# Altium PCB PCB1.PcbDoc
Units mil, origin at the board's own origin, x right, y up, seen from the top; angles counter-clockwise.
Board outline 2645 x 2475 mil, 2 copper layers (Top Layer, Bottom Layer); 55 components, 65 nets, 221 pads, 16 vias.
Unrouted connection lines stored in the file: 45.
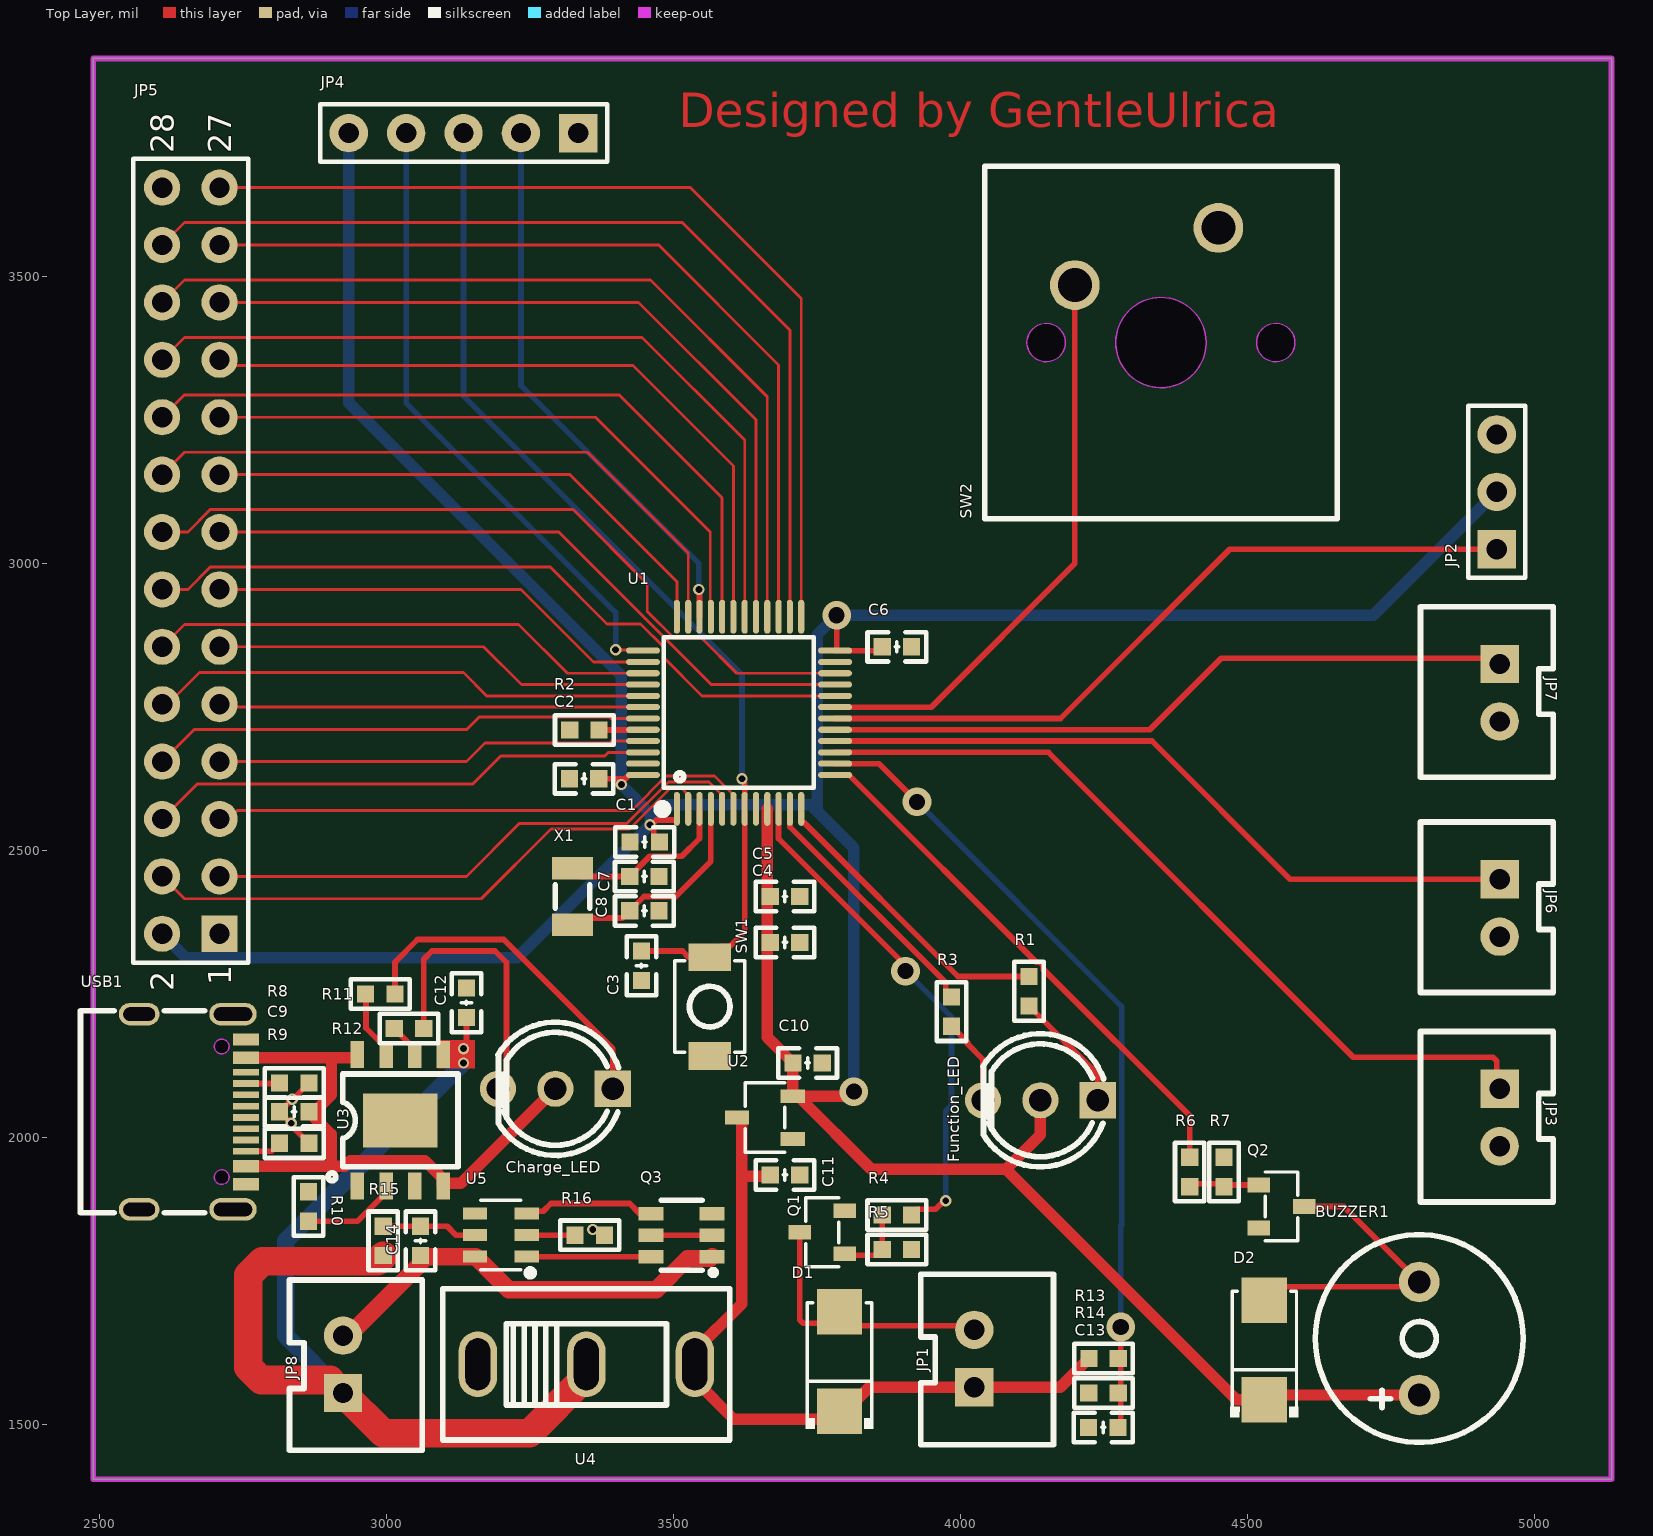
[diagram p0: Top Layer view]
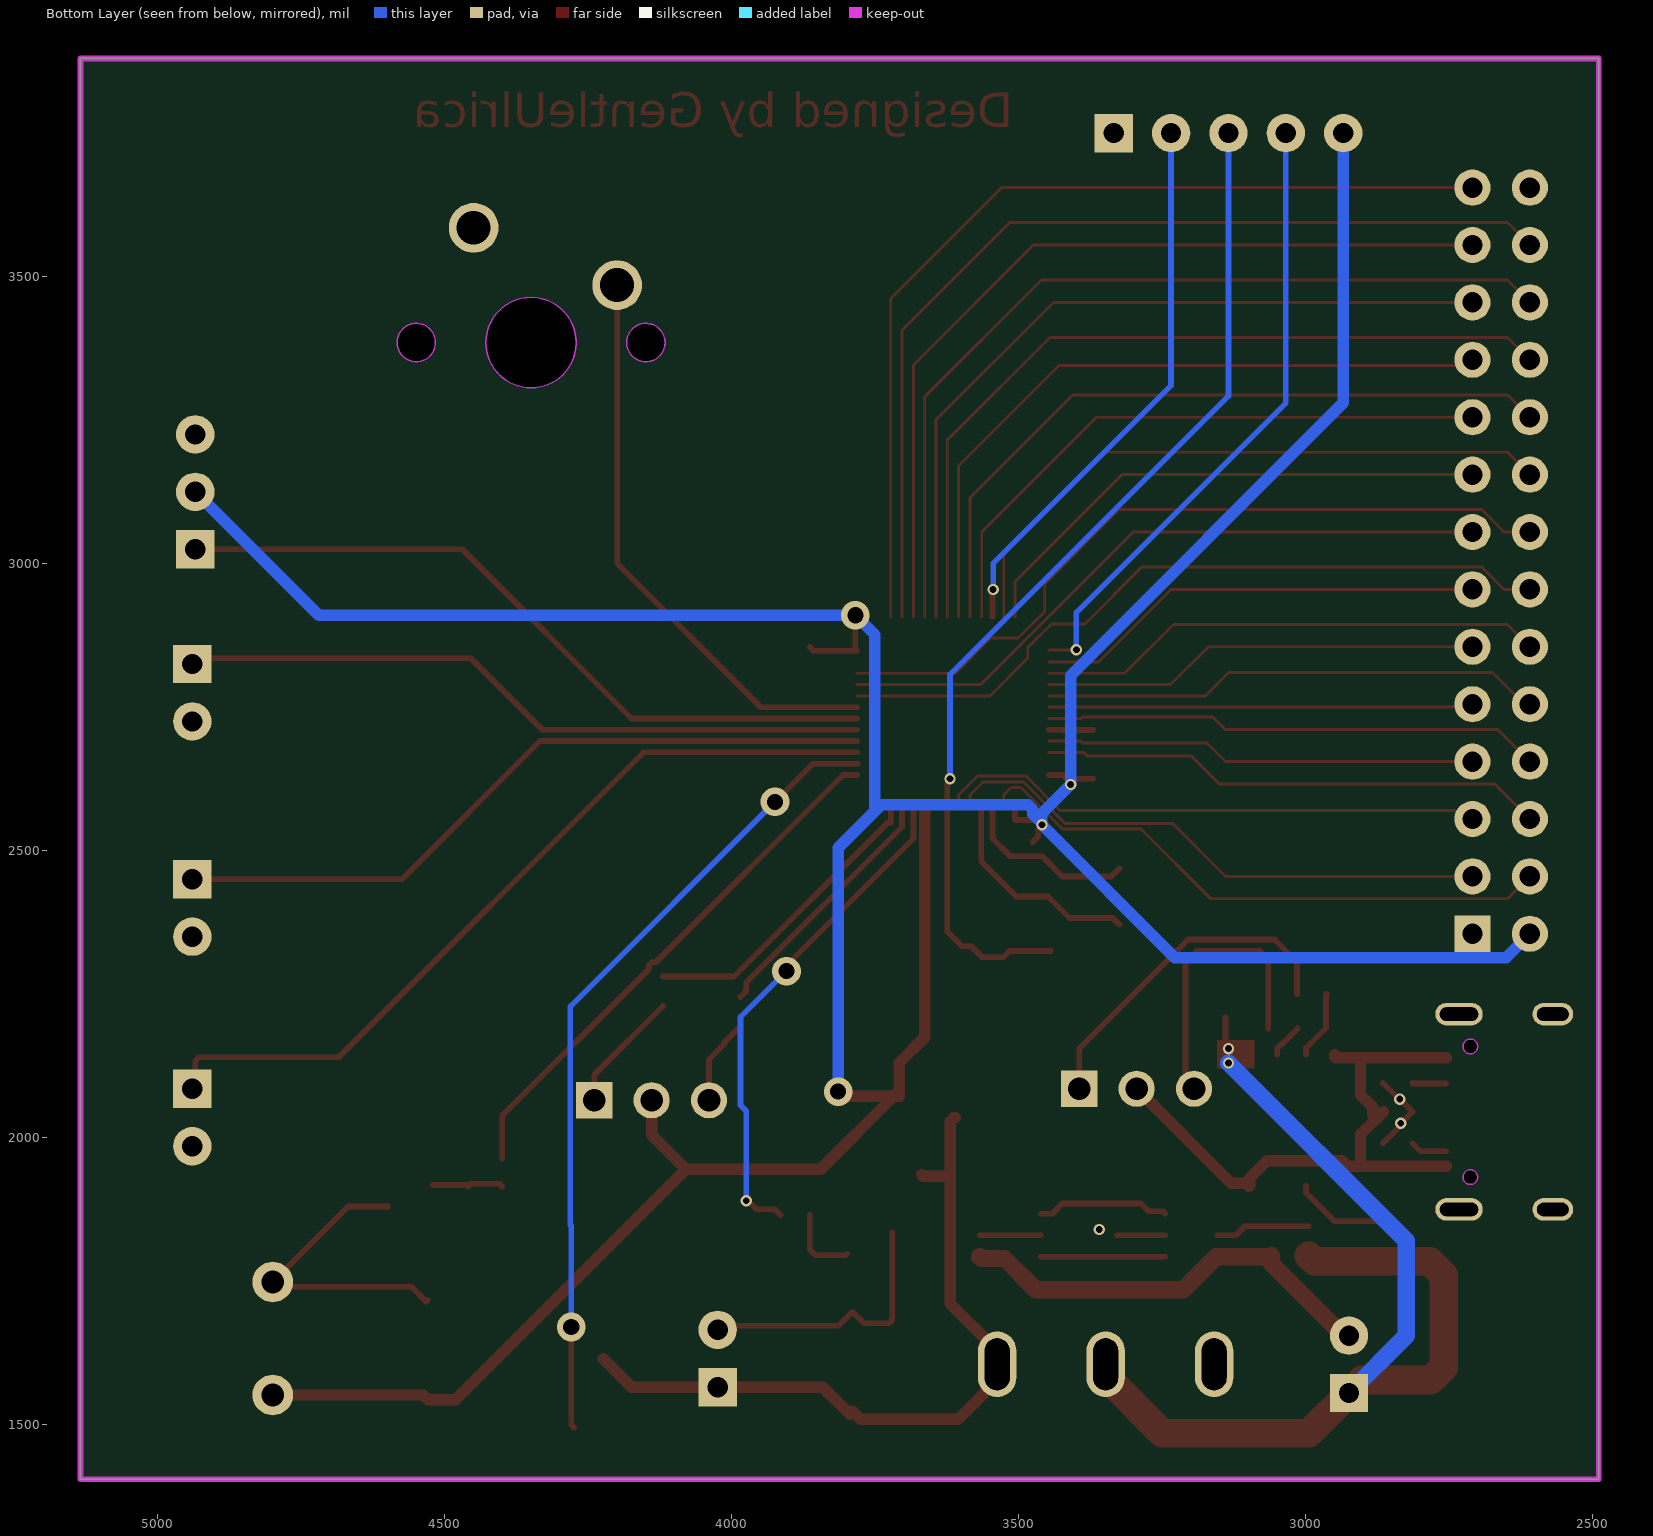
[diagram p1: Bottom Layer view, seen from below]

## Layer stack, top to bottom
Top Solder: solder mask 0.4, Solder Resist, Dk 3.5
Top Layer: signal copper 1.4
Dielectric 1: dielectric 12.6, FR-4, Dk 4.8
Bottom Layer: signal copper 1.4
Bottom Solder: solder mask 0.4, Solder Resist, Dk 3.5

## Board outline
2490,1405 2490,3880 5135,3880 5135,1405

## Design rules (kind name [scope] priority, off if disabled: settings)
Clearance [All] p1: gap=5 ignorepadtopadclearanceinfootprint=FALSE
PolygonConnect [All] p1: connectstyle=Relief reliefconductorwidth=10 reliefentries=4 polygonreliefangle="90 Angle" airgapwidth=10
RoutingVias [All] p1: holewidth=11.81 width=19.68 viastyle="Through Hole" minholewidth=11.81 minwidth=19.68 maxholewidth=11.81 maxwidth=19.68
SolderMaskExpansion [All] p1: expansion=0 istentingtop=FALSE
SupplyNets "Schematic Supply Nets" [InNet('GND')] p1: voltage=0.000
Width [All] p1: maxlimit=10 minlimit=5 preferedwidth=5
30 further rules are at their usual default settings.

## Components (designator, comment, footprint, x,y, rotation, side; value= is the part's Value field where it differs from the comment)
BUZZER1 "hnb09a03" BUZ-TH_BD9.0-P5.00-D0.6-FD 4800,1650 r90 top value=3kHz
C1 "4.7uF" "C 0603_L" 3450.59,2515 r0 top
C2 "100nF" "C 0603_L" 3345,2625 r180 top
C3 "100nF" "C 0603_L" 3445,2299.41 r90 top
C4 "1uF" "C 0603_L" 3695,2340 r180 top
C5 "10nF" "C 0603_L" 3695,2420 r180 top
C6 "100nF" "C 0603_L" 3890,2855 r180 top
C7 "DNP" "C 0603_L" 3450,2455 r180 top
C8 "DNP" "C 0603_L" 3450,2395 r180 top
C9 "10uF" "C 0603_L" 2840,2045 r0 top
C10 "1uF" "C 0603_L" 3734.41,2130 r180 top
C11 "1uF" "C 0603_L" 3695,1935 r180 top
C12 "10uF" "C 0603_L" 3140,2235 r270 top
C13 "100nF" "C 0603_L" 4249.41,1495 r0 top
C14 "100nF" "C 0603_L" 3060,1820 r270 top
Charge_LED "tj-l5fytxhtcylc2r2g-a5" LED-TH_3P-BD5.9-P2.54-BI 3295,2085 r180 top
D1 "ss14_c83852" SMA_L4.3-W2.6-LS5.2-RD 3790,1610 r90 top
D2 "ss14_c83852" SMA_L4.3-W2.6-LS5.2-RD 4530,1630 r90 top
Function_LED "tj-l5fytxhtcylc2r2g-a5" LED-TH_3P-BD5.9-P2.54-BI 4140,2065 r180 top
JP1 "HDR-1X2" XH2.54-LI-2P 4025,1615 r90 top
JP2 "HDR-1X3" HDR2.54-LI-3P 4935,3125 r90 top
JP3 "HDR-1X2" XH2.54-LI-2P 4940,2035 r270 top
JP4 "HDR-1X5" HDR2.54-LI-5P 3135,3750 r180 top
JP5 "Header 2X11" HDR2.54-LI-2x14P 2660,3005 r90 top
JP6 "HDR-1X2" XH2.54-LI-2P 4940,2400 r270 top
JP7 "HDR-1X2" XH2.54-LI-2P 4940,2775 r270 top
JP8 "HDR-1X2" XH2.54-LI-2P 2925,1605 r90 top
Q1 "ao3400a_c347475" SOT-23-3_L2.9-W1.3-P1.90-LS2.4-BR 3760,1835 r0 top
Q2 "ao3400a_c347475" SOT-23-3_L2.9-W1.3-P1.90-LS2.4-BR 4560,1880 r180 top
Q3 "fs8205a" SOT-23-6_L2.9-W1.6-P0.95-LS2.8-BR 3515,1830 r0 top
R1 "1K" "R 0603_L" 4120,2255 r90 top
R2 "10K" "R 0603_L" 3345.59,2710 r180 top
R3 "1K" "R 0603_L" 3985,2219.41 r90 top
R4 "100" "R 0603_L" 3890,1865 r180 top
R5 "10K" "R 0603_L" 3890,1805 r180 top
R6 "100" "R 0603_L" 4400,1940 r90 top
R7 "10K" "R 0603_L" 4460,1940 r270 top
R8 "5.1K" "R 0603_L" 2840,2095 r180 top
R9 "5.1K" "R 0603_L" 2840,1990 r180 top
R10 "2.4K" "R 0603_L" 2865,1880 r270 top
R11 "2.2K" "R 0603_L" 2990,2250 r180 top
R12 "2.2K" "R 0603_L" 3040,2190 r180 top
R13 "1M" "R 0603_L" 4250,1615 r180 top
R14 "1M" "R 0603_L" 4250,1555 r0 top
R15 "100" "R 0603_L" 2995,1820 r90 top
R16 "1K" "R 0603_L" 3355,1830 r180 top
SW1 "ts-1088-ar02016" SW-SMD_L3.9-W3.0-P4.45 3563.94,2228.19 r90 top
SW2 "mx1a-11nw" SW-TH_MX1A-11NW 4325,3535 r0 top
U1 "stm32f031c6t6" LQFP-48_L7.0-W7.0-P0.50-LS9.0-BL 3615,2740 r0 top locked
U2 "xc6206p332mr-g_c5446" SOT-23-3_L2.9-W1.6-P1.90-LS2.8-BR 3660,2035 r0 top
U3 "tp4056_c382139" ESOP-8_L4.9-W3.9-P1.27-LS6.0-BL-EP 3025,2030 r0 top
U4 "hx ss12d10g5" SW-TH_3P-P4.80-HX-SS12D10G4 3348.97,1605 r0 top
U5 "dw01a_c351410" SOT-23-6_L2.9-W1.6-P0.95-LS2.8-BL 3200,1830 r90 top
USB1 "typec-16p_c53207138" USB-C-SMD_TYPEC-16P_C53207138 2663.01,2044.92 r270 top
X1 "q13fc13500004_c32346" FC-135R_L3.2-W1.5 3325,2420 r270 top value=32.768kHz

## Footprints (in the part's own frame and the unit in brackets; to place one, negate y for a bottom-side part, rotate by r counter-clockwise, add the part's x,y. Pads: shape width x height; smd on the part's side, far side on the other; paste and mask are expansions set on the pad)
BUZ-TH_BD9.0-P5.00-D0.6-FD [mm]
  round 1.8 hole 1 copper offset 0,0: 1(-2.5,0)
  round 1.8 hole 1: 2(2.5,0)
  silkscreen extent -4.6,-4.6 4.6,4.6
"C 0603_L" [mil] "无极性贴片电容                                       淘宝ID:黄晶宝石"
  rect 30x30 smd: 1(-25.59,0) 2(25.59,0)
  silkscreen extent -51,-26 51,26, body extent -31,-16 31,16, height 32
ESOP-8_L4.9-W3.9-P1.27-LS6.0-BL-EP [mm]
  rect 0.6x1.2 smd: 1(-1.905,-2.908) 2(-0.635,-2.908) 3(0.635,-2.908) 4(1.905,-2.908) 5(1.905,2.908) 6(0.635,2.908) 7(-0.635,2.908) 8(-1.905,2.908)
  rect 3.3x2.4 smd: 9(0,0)
  silkscreen extent -3.2,-2.67 2.55,2.05
FC-135R_L3.2-W1.5 [mm]
  rect 1x1.8 smd: 1(-1.25,0) 2(1.25,0)
  silkscreen extent -0.51,-0.76 0.51,0.76
HDR2.54-LI-2x14P [mm] "双排排针，14x2脚 淘宝ID:黄晶宝石   店铺网址:https://shop463601444.taobao.com"
  rect 1.6x1.6 hole 0.9: 1(-16.51,-1.27)
  round 1.6 hole 0.9: 2(-16.51,1.27) 3(-13.97,-1.27) 4(-13.97,1.27) 5(-11.43,-1.27) 6(-11.43,1.27) 7(-8.89,-1.27) 8(-8.89,1.27) 9(-6.35,-1.27) 10(-6.35,1.27) 11(-3.81,-1.27) 12(-3.81,1.27) 13(-1.27,-1.27) 14(-1.27,1.27) 15(1.27,-1.27) 16(1.27,1.27) 17(3.81,-1.27) 18(3.81,1.27) 19(6.35,-1.27) 20(6.35,1.27) 21(8.89,-1.27) 22(8.89,1.27) 23(11.43,-1.27) 24(11.43,1.27) 25(13.97,-1.27) 26(13.97,1.27) 27(16.51,-1.27) 28(16.51,1.27)
  silkscreen extent -17.78,-2.54 17.78,2.54, body extent -17.78,-2.54 17.78,2.54, height 8.5
HDR2.54-LI-3P [mm] "排针，3脚"
  rect 1.7x1.7 hole 0.9: 1(-2.54,0)
  round 1.7 hole 0.9: 2(0,0) 3(2.54,0)
  silkscreen extent -3.81,-1.27 3.81,1.27, body extent -3.81,-1.27 3.81,1.27, height 8.5
HDR2.54-LI-5P [mm] "排针，5脚"
  rect 1.7x1.7 hole 0.9: 1(-5.08,0)
  round 1.7 hole 0.9: 2(-2.54,0) 3(0,0) 4(2.54,0) 5(5.08,0)
  silkscreen extent -6.35,-1.27 6.35,1.27, body extent -6.35,-1.27 6.35,1.27, height 8.5
LED-TH_3P-BD5.9-P2.54-BI [mm]
  rect 1.6x1.6 hole 1: 1(-2.54,0)
  round 1.6 hole 1: 2(0,0) 3(2.54,0)
  silkscreen extent -2.79,-2.95 2.54,2.95
LQFP-48_L7.0-W7.0-P0.50-LS9.0-BL [mm]
  oval 0.27x1.5 smd paste+0 mask+0.05: 1(-2.75,-4.25) 2(-2.25,-4.25) 3(-1.75,-4.25) 4(-1.25,-4.25) 5(-0.75,-4.25) 6(-0.25,-4.25) 7(0.25,-4.25) 8(0.75,-4.25) 9(1.25,-4.25) 10(1.75,-4.25) 11(2.25,-4.25) 12(2.75,-4.25) 25(2.75,4.25) 26(2.25,4.25) 27(1.75,4.25) 28(1.25,4.25) 29(0.75,4.25) 30(0.25,4.25) 31(-0.25,4.25) 32(-0.75,4.25) 33(-1.25,4.25) 34(-1.75,4.25) 35(-2.25,4.25) 36(-2.75,4.25)
  oval 1.5x0.27 smd paste+0 mask+0.05: 13(4.25,-2.75) 14(4.25,-2.25) 15(4.25,-1.75) 16(4.25,-1.25) 17(4.25,-0.75) 18(4.25,-0.25) 19(4.25,0.25) 20(4.25,0.75) 21(4.25,1.25) 22(4.25,1.75) 23(4.25,2.25) 24(4.25,2.75) 37(-4.25,2.75) 38(-4.25,2.25) 39(-4.25,1.75) 40(-4.25,1.25) 41(-4.25,0.75) 42(-4.25,0.25) 43(-4.25,-0.25) 44(-4.25,-0.75) 45(-4.25,-1.25) 46(-4.25,-1.75) 47(-4.25,-2.25) 48(-4.25,-2.75)
  silkscreen extent -3.59,-4.46 3.3,3.34
"R 0603_L" [mil] "1/10W贴片电阻                 淘宝ID:黄晶宝石"
  rect 30x30 smd: 1(-25.59,0) 2(25.59,0)
  silkscreen extent -51,-26 51,26, body extent -31,-16 32,16, height 16
SMA_L4.3-W2.6-LS5.2-RD [mm]
  rect 2x2 smd: 1(-2.2,0) 2(2.2,0)
  silkscreen extent -2.98,-1.5 2.6,1.5
SOT-23-3_L2.9-W1.3-P1.90-LS2.4-BR [mm]
  rect 1x0.65 smd: 1(1,-0.95) 2(1,0.95) 3(-1,0)
  silkscreen extent -0.73,-1.53 0.73,1.53
SOT-23-3_L2.9-W1.6-P1.90-LS2.8-BR [mm]
  rect 1.07x0.6 smd: 1(1.235,-0.95) 2(1.235,0.95) 3(-1.235,0)
  silkscreen extent -0.88,-1.54 0.88,1.54
SOT-23-6_L2.9-W1.6-P0.95-LS2.8-BL [mil]
  rect 20.95x42.2 smd: 1(-37.4,-45.24) 2(0,-45.24) 3(37.4,-45.24) 4(37.4,45.24) 5(0,45.24) 6(-37.4,45.24)
  silkscreen extent -72,-57 61,35
SOT-23-6_L2.9-W1.6-P0.95-LS2.8-BR [mm]
  rect 1.1x0.6 smd paste+0 mask+0.051: 1(1.35,-0.95) 2(1.35,0) 3(1.35,0.95) 4(-1.35,0.95) 5(-1.35,0) 6(-1.35,-0.95)
  silkscreen extent -0.9,-1.78 1.52,1.55
SW-SMD_L3.9-W3.0-P4.45 [mm]
  rect 1.23x1.86 smd: 1(-2.185,0) 2(2.185,0)
  silkscreen extent -2.03,-1.54 2.03,1.54
SW-TH_3P-P4.80-HX-SS12D10G4 [mm]
  oval 1.7x2.9 hole 1.1 slot 2.3 at 90 deg paste-2539.97 mask+0.05: 1(-4.8,0) 2(0,0) 3(4.8,0)
  silkscreen extent -6.35,-3.35 6.35,3.35
SW-TH_MX1A-11NW [mm]
  round 2.2 hole 1.5 paste-2539.97 mask+0.05: 1(-3.175,-1.27) 2(3.175,1.27)
  Keep-Out Layer board cut-out: 2.635,-3.81 2.436,-4.677 1.881,-5.373 1.08,-5.759 0.19,-5.759 -0.611,-5.373 -1.166,-4.677 -1.364,-3.81 -1.365,-3.81 -1.166,-2.943 -0.611,-2.247 0.19,-1.861 1.08,-1.861 1.881,-2.247 2.436,-2.943 2.634,-3.81
  Keep-Out Layer board cut-out: -3.594,-3.81 -3.678,-4.179 -3.914,-4.475 -4.256,-4.64 -4.634,-4.64 -4.976,-4.475 -5.212,-4.179 -5.296,-3.81 -5.296,-3.81 -5.212,-3.441 -4.976,-3.145 -4.634,-2.98 -4.256,-2.98 -3.914,-3.145 -3.678,-3.441 -3.594,-3.81
  Keep-Out Layer board cut-out: 6.566,-3.81 6.482,-4.179 6.246,-4.475 5.904,-4.64 5.526,-4.64 5.184,-4.475 4.948,-4.179 4.864,-3.81 4.864,-3.81 4.948,-3.441 5.184,-3.145 5.526,-2.98 5.904,-2.98 6.246,-3.145 6.482,-3.441 6.566,-3.81
  Keep-Out Layer circle w0.003: c0.635,-3.81 r2
  Keep-Out Layer circle w0.003: c-4.445,-3.81 r0.851
  Keep-Out Layer circle w0.003: c5.715,-3.81 r0.851
  Keep-Out Layer region: 2.635,-3.81 2.436,-4.677 1.881,-5.373 1.08,-5.759 0.19,-5.759 -0.611,-5.373 -1.166,-4.677 -1.364,-3.81 -1.365,-3.81 -1.166,-2.943 -0.611,-2.247 0.19,-1.861 1.08,-1.861 1.881,-2.247 2.436,-2.943 2.634,-3.81
  Keep-Out Layer region: -3.594,-3.81 -3.678,-4.179 -3.914,-4.475 -4.256,-4.64 -4.634,-4.64 -4.976,-4.475 -5.212,-4.179 -5.296,-3.81 -5.296,-3.81 -5.212,-3.441 -4.976,-3.145 -4.634,-2.98 -4.256,-2.98 -3.914,-3.145 -3.678,-3.441 -3.594,-3.81
  Keep-Out Layer region: 6.566,-3.81 6.482,-4.179 6.246,-4.475 5.904,-4.64 5.526,-4.64 5.184,-4.475 4.948,-4.179 4.864,-3.81 4.864,-3.81 4.948,-3.441 5.184,-3.145 5.526,-2.98 5.904,-2.98 6.246,-3.145 6.482,-3.441 6.566,-3.81
  Keep-Out Layer region: 2.635,-3.81 2.625,-4.006 2.597,-4.2 2.549,-4.391 2.483,-4.575 2.399,-4.753 2.298,-4.921 2.181,-5.079 2.049,-5.224 1.904,-5.356 1.746,-5.473 1.578,-5.574 1.4,-5.658 1.216,-5.724 1.025,-5.772 0.831,-5.8 0.635,-5.81 0.439,-5.8 0.245,-5.772 0.054,-5.724 -0.13,-5.658 -0.308,-5.574 -0.476,-5.473 -0.634,-5.356 -0.779,-5.224 -0.911,-5.079 -1.028,-4.921 -1.129,-4.753 -1.213,-4.575 -1.279,-4.391 -1.327,-4.2 -1.355,-4.006 -1.365,-3.81 -1.355,-3.614 -1.327,-3.42 -1.279,-3.229 -1.213,-3.045 -1.129,-2.867 -1.028,-2.699 -0.911,-2.541 -0.779,-2.396 -0.634,-2.264 -0.476,-2.147 -0.308,-2.046 -0.13,-1.962 0.054,-1.896 0.245,-1.848 0.439,-1.82 0.635,-1.81 0.831,-1.82 1.025,-1.848 1.216,-1.896 1.4,-1.962 1.578,-2.046 1.746,-2.147 1.904,-2.264 2.049,-2.396 2.181,-2.541 2.298,-2.699 2.399,-2.867 2.483,-3.045 2.549,-3.229 2.597,-3.42 2.625,-3.614 2.635,-3.81
  Keep-Out Layer region: -3.594,-3.81 -3.604,-3.937 -3.632,-4.061 -3.678,-4.179 -3.742,-4.289 -3.821,-4.389 -3.914,-4.475 -4.02,-4.547 -4.134,-4.602 -4.256,-4.64 -4.381,-4.659 -4.509,-4.659 -4.634,-4.64 -4.756,-4.602 -4.87,-4.547 -4.976,-4.475 -5.069,-4.389 -5.148,-4.289 -5.212,-4.179 -5.258,-4.061 -5.286,-3.937 -5.296,-3.81 -5.286,-3.683 -5.258,-3.559 -5.212,-3.441 -5.148,-3.331 -5.069,-3.231 -4.976,-3.145 -4.87,-3.073 -4.756,-3.018 -4.634,-2.98 -4.509,-2.961 -4.381,-2.961 -4.256,-2.98 -4.134,-3.018 -4.02,-3.073 -3.914,-3.145 -3.821,-3.231 -3.742,-3.331 -3.678,-3.441 -3.632,-3.559 -3.604,-3.683 -3.594,-3.81
  Keep-Out Layer region: 6.566,-3.81 6.556,-3.937 6.528,-4.061 6.482,-4.179 6.418,-4.289 6.339,-4.389 6.246,-4.475 6.14,-4.547 6.026,-4.602 5.904,-4.64 5.779,-4.659 5.651,-4.659 5.526,-4.64 5.404,-4.602 5.29,-4.547 5.184,-4.475 5.091,-4.389 5.012,-4.289 4.948,-4.179 4.902,-4.061 4.874,-3.937 4.864,-3.81 4.874,-3.683 4.902,-3.559 4.948,-3.441 5.012,-3.331 5.091,-3.231 5.184,-3.145 5.29,-3.073 5.404,-3.018 5.526,-2.98 5.651,-2.961 5.779,-2.961 5.904,-2.98 6.026,-3.018 6.14,-3.073 6.246,-3.145 6.339,-3.231 6.418,-3.331 6.482,-3.441 6.528,-3.559 6.556,-3.683 6.566,-3.81
  silkscreen extent -7.17,-11.61 8.43,3.99
USB-C-SMD_TYPEC-16P_C53207138 [mm]
  oval 1x2.1 hole 0.6 slot 1.7 at 90 deg paste-2539.97 mask+0.05: 12(-4.32,1.787) 13(4.32,1.787)
  oval 1x1.8 hole 0.6 slot 1.4 at 90 deg paste-2539.97 mask+0.05: 14(-4.32,-2.362) 15(4.32,-2.362)
  rect 0.3x1.15 smd paste-100 mask+0.05: A5(-1.25,2.362) A6(-0.25,2.362) A7(0.25,2.362) A8(1.25,2.362) B5(1.75,2.362) B6(0.75,2.362) B7(-0.75,2.362) B8(-1.75,2.362)
  rect 0.55x1.15 smd paste-100 mask+0.05: A9B4(2.4,2.362) A12B1(3.2,2.362) B9A4(-2.4,2.362) B12A1(-3.2,2.362)
  Keep-Out Layer board cut-out: -2.565,1.287 -2.597,1.146 -2.687,1.033 -2.818,0.97 -2.962,0.97 -3.093,1.033 -3.183,1.146 -3.215,1.287 -3.215,1.287 -3.183,1.428 -3.093,1.542 -2.962,1.604 -2.818,1.604 -2.687,1.542 -2.597,1.428 -2.565,1.287
  Keep-Out Layer board cut-out: 3.215,1.287 3.183,1.146 3.093,1.033 2.962,0.97 2.818,0.97 2.687,1.033 2.597,1.146 2.565,1.287 2.565,1.287 2.597,1.428 2.687,1.542 2.818,1.604 2.962,1.604 3.093,1.542 3.183,1.428 3.215,1.287
  Keep-Out Layer circle w0.003: c-2.89,1.287 r0.325
  Keep-Out Layer circle w0.003: c2.89,1.287 r0.325
  Keep-Out Layer region: -2.565,1.287 -2.597,1.146 -2.687,1.033 -2.818,0.97 -2.962,0.97 -3.093,1.033 -3.183,1.146 -3.215,1.287 -3.215,1.287 -3.183,1.428 -3.093,1.542 -2.962,1.604 -2.818,1.604 -2.687,1.542 -2.597,1.428 -2.565,1.287
  Keep-Out Layer region: 3.215,1.287 3.183,1.146 3.093,1.033 2.962,0.97 2.818,0.97 2.687,1.033 2.597,1.146 2.565,1.287 2.565,1.287 2.597,1.428 2.687,1.542 2.818,1.604 2.962,1.604 3.093,1.542 3.183,1.428 3.215,1.287
  Keep-Out Layer region: -2.565,1.287 -2.574,1.21 -2.602,1.136 -2.647,1.072 -2.705,1.02 -2.775,0.984 -2.851,0.965 -2.929,0.965 -3.005,0.984 -3.075,1.02 -3.133,1.072 -3.178,1.136 -3.206,1.21 -3.215,1.287 -3.206,1.365 -3.178,1.438 -3.133,1.503 -3.075,1.555 -3.005,1.591 -2.929,1.61 -2.851,1.61 -2.775,1.591 -2.705,1.555 -2.647,1.503 -2.602,1.438 -2.574,1.365 -2.565,1.287
  Keep-Out Layer region: 3.215,1.287 3.206,1.21 3.178,1.136 3.133,1.072 3.075,1.02 3.005,0.984 2.929,0.965 2.851,0.965 2.775,0.984 2.705,1.02 2.647,1.072 2.602,1.136 2.574,1.21 2.565,1.287 2.574,1.365 2.602,1.438 2.647,1.503 2.705,1.555 2.775,1.591 2.851,1.61 2.929,1.61 3.005,1.591 3.075,1.555 3.133,1.503 3.178,1.438 3.206,1.365 3.215,1.287
  silkscreen extent -4.47,-4.96 4.47,0.52
XH2.54-LI-2P [mm] "接插件，2P  淘宝ID:黄晶宝石   店铺网址:https://shop463601444.taobao.com"
  rect 1.7x1.7 hole 0.9: 1(-1.27,0)
  round 1.7 hole 0.9: 2(1.27,0)
  silkscreen extent -3.81,-3.51 3.74,2.37, body extent -3.77,-3.3 3.77,2.4, height 7.05

## Part data
BUZZER1: "驱动方式:有源(内含驱动线路);构造类型:电磁式;额定电压:3V;频率:3kHz;声压(SPL):85dB;", Continuous Operating Time=-, Current Consumption=30mA, JLCPCB Part Class="Extended Part", LCSC Part Name=电磁式有源一体蜂鸣器HNB09A03, Manufacturer=华能, ManufacturerPart=HNB09A03, Operating Temperature=-20℃~+70℃, Voltage - Supply=1.5V~4.5V, Voltage Rating=3V, AddInBom=yes, ConvertToPcb=yes, Datasheet=https://item.szlcsc.com/datasheet/HNB09A03/97306.html, Diameter(φD)=9mm, Driver Circuitry=有源(内含驱动线路), FootprintName=BUZ-TH_BD9.0-P5.00-D0.6-FD, Height=5.5mm, Lead Pitch=-, Length=-, ModelId=13273335caac486e928bafb4d9fdf12d, ModelName=BUZ-TH_D9.0-H5.5-P5.0, ModelTransform=354.33,354.33,0,90,0,0,-0.005,0,-177.165, Mounting Type=-, Sound Pressure Level(SPL)=85dB, Supplier=LCSC, Supplier Footprint=插件,D=9mm, SupplierPart=C96102, Symbol=HNB09A03, Technology=电磁式, Width=-
C1 C2 C3 C4 C5 C6 C7 C8 C9 C10 C11 C12 C13 C14: library part C, "贴片电容", BOM名称=无极性贴片电容, 淘宝ID="封装库来自淘宝 ID：黄晶宝石", 联系售后=https://shop463601444.taobao.com
Charge_LED Function_LED: "灯头类型:5mm圆形灯头;发光颜色:红色,翠绿色;正向压降(Vf):1.8V~2.6V；2.8V~3.6V;功率:180mW;正向电流:20mA;波长:515nm~530nm；620nm~630nm;二极管配置:共阳极;透镜颜色:无色透明透镜;色温:-;发光强度:3cd；12cd;发光角度:-;载带方式:-;工作温度:-20℃~+80℃;", Color Temperature=-, Forward Current=20mA, Illumination Color=红色,翠绿色, JLCPCB Part Class="Extended Part", LCSC Part Name=红灯,翠绿, Lens Color=无色透明透镜, Manufacturer=TOGIALED(统佳), ManufacturerPart=TJ-L5FYTXHTCYLC2R2G-A5, Operating Temperature=-20℃~+80℃, Power(Watts)=180mW, Voltage - Forward(Vf)=1.8V~2.6V；2.8V~3.6V, AddInBom=yes, ConvertToPcb=yes, Datasheet=https://item.szlcsc.com/datasheet/TJ-L5FYTXHTCYLC2R2G-A5/310417.html, Diode Configuration=共阳极, FootprintName=LED-TH_3P-BD5.9-P2.54-BI, Lamp Holder Type=5mm圆形灯头, Luminous Intensity=3cd；12cd, ModelId=a0f6434cf7e449c5b15c4f0abbd87fd8, ModelName=LED-TH_3P-BD5.9-H8.6-P2.54, ModelTransform=225.9838,232.069,0,0,0,0,0,0,-137.795, Mounting Style=-, Peak Wavelength=518nm；630nm, Supplier=LCSC, Supplier Footprint=插件,D=5mm, SupplierPart=C331048, Symbol=TJ-L5FYTXHTCYLC2R2G-A5, Viewing Angle=-, Wavelength - Dominant=515nm~530nm；620nm~630nm
D1 D2: "正向压降(Vf):500mV@1A;直流反向耐压(Vr):40V;整流电流:1A;", Current - Rectified=1A, JLCPCB Part Class="Extended Part", LCSC Part Name="电压:40V 电流:1A", Manufacturer=onsemi(安森美), ManufacturerPart=SS14, Non-Repetitive Peak Forward Surge Current=40A, Operating Junction Temperature Range=-65℃~+125℃, Reverse Leakage Current (Ir)=200uA@40V, Voltage - DC Reverse(Vr)=40V, Voltage - Forward(Vf@If)=500mV@1A, AddInBom=yes, ConvertToPcb=yes, Datasheet=https://item.szlcsc.com/datasheet/SS14/85019.html, FootprintName=SMA_L4.3-W2.6-LS5.2-RD, ModelId=e3551acb3c5a4975a5e9d36087fe1fa2, ModelName=SMA_L4.3-W2.6-LS5.2-RD, ModelTransform=185.039,102.362,0,0,0,0,0,0,0, Supplier=LCSC, Supplier Footprint=SMA(DO-214AC), SupplierPart=C83852, Symbol=SS14_C83852
JP1 JP3 JP6 JP7 JP8: library part "Header 2", "2P接插件", BOM名称=2P接插件, 版权归属="封装库来自淘宝 ID：黄晶宝石", 联系售后=https://shop463601444.taobao.com
JP2: library part "Header 3", "3P接插件", BOM名称=3P接插件, 学习资源=https://shop463601444.taobao.com, 版权归属="封装库来自淘宝 ID：黄晶宝石"
JP4: library part "Header 5", "5P接插件", BOM名称=5P接插件, 学习资源=https://shop463601444.taobao.com, 版权归属="封装库来自淘宝 ID：黄晶宝石"
JP5: library part "Header 14X2", "14*2P接插件", BOM名称=14*2P接插件, 学习资源=www.ooocke.com, 版权归属=源创客
Q1 Q2: "数量:1个N沟道;漏源电压(Vdss):30V;连续漏极电流(Id):5.8A;导通电阻(RDS(on)):17mΩ@10V;耗散功率(Pd):1.4W;阈值电压(Vgs(th)):1.1V;", Current - Continuous Drain(Id)=5.8A, Drain to Source Voltage=30V, Gate Threshold Voltage (Vgs(th))=1.1V, Input Capacitance(Ciss)=823pF, JLCPCB Part Class="Extended Part", LCSC Part Name="1个N沟道 耐压:30V 电流:5.8A", Manufacturer=UMW(友台半导体), ManufacturerPart=AO3400A, Operating Temperature=-55℃~+150℃, Output Capacitance(Coss)=99pF, Pd - Power Dissipation=1.4W, Reverse Transfer Capacitance (Crss@Vds)=77pF, AddInBom=yes, ConvertToPcb=yes, Datasheet=https://item.szlcsc.com/datasheet/AO3400A/324135.html, FootprintName=SOT-23-3_L2.9-W1.3-P1.90-LS2.4-BR, Gate Charge(Qg)=9.7nC@4.5V, ModelId=c62791f0466c4ae2a892c056b845b0ca, ModelName=SOT-23-3P_L2.9-W1.3-H1.0-LS2.4-P0.95, ModelTransform=98.425,114.173,0,180,0,0,0.0005,-0.0005,0, Number=1个N沟道, RDS(on)=17mΩ@10V, Supplier=LCSC, Supplier Footprint=SOT-23, SupplierPart=C347475, Symbol=AO3400A_C347475
Q3: "类型:2个N沟道;漏源电压(Vdss):20V;连续漏极电流(Id):6A;导通电阻(RDS(on)@Vgs,Id):25mΩ@2.5V,3A;功率(Pd):1.5W;阈值电压(Vgs(th)@Id):500mV@250uA;", Continuous Drain Current (Id)=6A, Drain Source On Resistance (RDS(on)@Vgs,Id)=25mΩ@2.5V,3A, Drain Source Voltage (Vdss)=20V, Gate Threshold Voltage (Vgs(th)@Id)=500mV@250uA, Input Capacitance (Ciss@Vds)=466pF@10V, JLCPCB Part Class="Extended Part", LCSC Part Name="2个N沟道 耐压:20V 电流:6A", Manufacturer="TECH PUBLIC(台舟)", ManufacturerPart=FS8205A, Operating Temperature=-55℃~+150℃, Power Dissipation (Pd)=1.5W, Reverse Transfer Capacitance (Crss@Vds)=58pF@10V, AddInBom=yes, ConvertToPcb=yes, Datasheet=https://atta.szlcsc.com/upload/public/pdf/source/20210810/F53B6D4E8755A1F8E11BAF814CE98E6A.pdf, FootprintName=SOT-23-6_L2.9-W1.6-P0.95-LS2.8-BR, ModelId=18da8f6c14a34920b3e136b5c401a119, ModelName=SOT-23-6_L2.9-W1.6-H1.5-LS2.8-P0.95, ModelTransform=110.73671,114.173,0,180,0,0,0.001,-0.003,0, Supplier=LCSC, Supplier Footprint=SOT-23-6, SupplierPart=C2830320, Symbol=FS8205A_C2830320, Total Gate Charge (Qg@Vgs)=5.7nC@10V, Type=2个N沟道
R1 R2 R3 R4 R5 R6 R7 R8 R9 R10 R11 R12 R13 R14 R15 R16: library part R, "贴片电阻", BOM名称=贴片电阻, 版权归属="来自淘宝 ID：黄晶宝石", 联系售后=https://shop463601444.taobao.com
SW1: "电路结构:单刀单掷;按钮形状:圆形按钮;作用力:1.6N;安装方式:立贴;开关长度:3.9mm;开关宽度:3mm;开关高度:2mm;带支架:不带支架;触点电流:50mA;额定电压:12V;带灯:-;工作寿命:10万次;", Actuator/Cap Color=黑色, Contact Current=50mA, IP Rating=-, JLCPCB Part Class="Basic Part", LCSC Part Name="3.9*3*2mm 立贴 轻触开关", Manufacturer=XUNPU(讯普), ManufacturerPart=TS-1088-AR02016, Operating Force=1.6N, Operating Temperature=-30℃~+80℃, Voltage Rating=12V, Actuator Style=圆形按钮, AddInBom=yes, Circuit=单刀单掷, ConvertToPcb=yes, Datasheet=https://item.szlcsc.com/datasheet/TS-1088-AR02016/763484.html, FootprintName=SW-SMD_L3.9-W3.0-P4.45, Length=3.9mm, Life=10万次, ModelId=b26698b69f274ffabef8a26c7d0e5dd1, ModelName=SW-SMD_L3.9-W2.9-H2.0-LS4.8, ModelTransform=188.976,114.174,0,0,0,0,0,0,0, Mounting Type=立贴, Supplier=LCSC, Supplier Footprint=SMD,4x3mm, SupplierPart=C720477, Switch Height=2mm, Symbol=TS-1088-AR02016, Termination Style=SMD接片, Width=3mm, with Bracket=不带支架, With Lamp=-
SW2: JLCPCB Part Class="Extended Part", LCSC Part Name=MX1A-11NW, Manufacturer=CHERRY, AddInBom=yes, ConvertToPcb=yes, Datasheet=https://item.szlcsc.com/datasheet/MX1A-11NW/3881518.html, FootprintName=SW-TH_MX1A-11NW, ManufacturerPart=MX1A-11NW, ModelId=82a0b1b0736d4246abdfab1c08b9c459, ModelName=SW-TH_MX1A-11NW, ModelTransform=614.172,614.172,0,0,0,0,24.409,-150.59,-125.984, Supplier=LCSC, Supplier Footprint=-, SupplierPart=C3316924, Symbol=MX1A-11NW
U1: "CPU内核:ARM Cortex-M0;CPU最大主频:48MHz;CPU位数:32 Bit;", JLCPCB Part Class="Extended Part", LCSC Part Name="主流ARM Cortex-M0基本型系列MCU，具有32 KB Flash、48 MHz CPU和电机控制", Manufacturer=ST(意法半导体), ManufacturerPart=STM32F031C6T6, Operating Temperature=-40℃~+85℃, Voltage - Supply=2V~3.6V, ADC (Bit)=12bit, AddInBom=yes, ConvertToPcb=yes, Core Size="32 Bit", CPU Core="ARM Cortex-M0", CPU Maximum Speed=48MHz, Datasheet=https://item.szlcsc.com/datasheet/STM32F031C6T6/98621.html, EEPROM=-, FootprintName=LQFP-48_L7.0-W7.0-P0.50-LS9.0-BL, ModelId=093be70396ff421eb2cdb946d5311efc, ModelName=LQFP-48_L7.0-W7.0-H1.4-LS9.0-P0.50, ModelTransform=354.331,354.331,0,0,0,0,0,0,0, Number of I/O=39, Oscillator Type=内置, Program Memory Type=FLASH, Program Storage Size=32KB, RAM Size=4KB, Supplier=LCSC, Supplier Footprint=LQFP-48(7x7), SupplierPart=C97413, Symbol=STM32F031C6T6
U2: "输出极性:正极;工作电压:6V;输出电压:3.3V;输出电流:200mA;电源纹波抑制比(PSRR):-;输出类型:固定;", JLCPCB Part Class="Basic Part", LCSC Part Name="3.3V 200mA 6V", Manufacturer=TOREX(特瑞仕), ManufacturerPart=XC6206P332MR-G, Operating Temperature=-40℃~+85℃@(Ta), Output Current=200mA, Output Voltage=3.3V, Power Supply Rejection Ratio (PSRR)=-, standby current=1uA, Voltage - Supply=6V, AddInBom=yes, ConvertToPcb=yes, Datasheet=https://item.szlcsc.com/datasheet/XC6206P332MR-G/5896.html, Features=短路保护；过流保护, FootprintName=SOT-23-3_L2.9-W1.6-P1.90-LS2.8-BR, ModelId=89cb27a44ab2466697082bb9fd73a7d0, ModelName=SOT-23-3L_L2.9-W1.6-H1.1-LS2.8-P0.95, ModelTransform=114.173,110.236,0,90,0,0,0,0,0, Noise=-, Number of Outputs=1, Output Configuration=正极, Output Type=固定, Supplier=LCSC, Supplier Footprint=SOT-23-3L, SupplierPart=C5446, Symbol=XC6206P332MR, Voltage Dropout=-
U3: "工作电压:4V~6V;最大充电电流:1A;电池类型:锂电池;电池节数:1;", Balance Current=-, Battery Temperature Detection=支持, Charge Current - Max=1A, Charging Saturation Voltage=4.2V, JLCPCB Part Class="Extended Part", LCSC Part Name=1A锂电池充电IC, Manufacturer=TPOWER(天源), ManufacturerPart=TP4056, Operating Temperature=-40℃~+85℃, Supply Current (Iq)=1uA, Voltage - Supply=4V~6V, 0V Battery Charge=-, AddInBom=yes, ConvertToPcb=yes, Datasheet=https://item.szlcsc.com/datasheet/TP4056/354934.html, End-Off Voltage=-, Features=恒压充电；恒流充电；自动再充电；充电终止；软启动；可编程充电电流；欠压锁定；涓流充电, FootprintName=ESOP-8_L4.9-W3.9-P1.27-LS6.0-BL-EP, Interface=-, ModelId=d3e00daa36c445139c055a3b9efb85d2, ModelName=ESOP-8_L4.9-W3.9-H1.6-LS6.0-P1.27, ModelTransform=240.157,192.913,0,90,0,0,0,0,0, Number of Cells=1, Supplier=LCSC, Supplier Footprint=ESOP-8, SupplierPart=C382139, Symbol=TP4056_C382139, The Chip Type=充电芯片, Type of Battery=锂电池
U4: "电路结构:单刀双掷;安装方式:直插;开关颜色:黑色;额定电流:2A;额定电压:125V;工作寿命:1万次;", Actuator Color=黑色, Current Rating=2A, JLCPCB Part Class="Extended Part", LCSC Part Name="两档立式插件 3脚拨动开关 柄长5.0mm", Manufacturer=hanxia(韩下), ManufacturerPart="HX SS12D10G5", Operating Temperature=-25℃~+70℃, Voltage Rating=125V, Actuator Style=矩形柱状, AddInBom=yes, Circuit=单刀双掷, ConvertToPcb=yes, Datasheet=https://item.szlcsc.com/datasheet/HX%2520SS12D10G5/20414075.html, FootprintName=SW-TH_3P-P4.80-HX-SS12D10G4, Length=12.7mm, Life=1万次, ModelId=cfce8581009a45839cc96a3fa85751f8, ModelName=SW-TH_SHOU-HAN_SS12D10G4, ModelTransform=499.999,263.779,0,0,0,0,-0.589,-0.591,-196.85, Mounting Type=直插, Supplier=LCSC, Supplier Footprint=插件-3P,12.7x6.7mm, SupplierPart=C19189120, Switch Height=11.6mm, Symbol="HX SS12D10G5", Termination Style=PC引脚, Width=6.7mm
U5: "工作电压:300mV~10V;最大充电电流:-;电池类型:锂电池;电池节数:1;", Balance Current=-, Battery Temperature Detection=不支持, Charging Saturation Voltage=4.3V, End-Off Voltage=2.5V, JLCPCB Part Class="Extended Part", LCSC Part Name=单节锂离子/锂聚合物电池保护IC, Manufacturer=PUOLOP(迪浦), ManufacturerPart=DW01A, Operating Temperature=-40℃~+85℃, Supply Current (Iq)=3uA, Voltage - Supply=300mV~10V, 0V Battery Charge=支持, AddInBom=yes, Charge Current - Max=-, ConvertToPcb=yes, Datasheet=https://item.szlcsc.com/datasheet/DW01A/327628.html, Features=过流保护；过充保护；过放保护；短路保护, FootprintName=SOT-23-6_L2.9-W1.6-P0.95-LS2.8-BL, Interface=-, ModelId=18da8f6c14a34920b3e136b5c401a119, ModelName=SOT-23-6_L2.9-W1.6-H1.5-LS2.8-P0.95, ModelTransform=110.236,113.364,0,90,0,0,0.0005,0.0005,0, Number of Cells=1, Supplier=LCSC, Supplier Footprint=SOT-23-6L, SupplierPart=C351410, Symbol=DW01A_C351410, The Chip Type=保护芯片, Type of Battery=锂电池
USB1: "连接器类型:Type-C;协议标准:-;公母:母;安装方式:卧贴;触点数量:16P;端口数量:1;额定电流 - 电源:3A;工作温度:-40℃~+85℃;", Current Rating-Power=3A, Detection color=黑色, JLCPCB Part Class="Extended Part", LCSC Part Name="Type-C 母 卧贴", Manufacturer=BXCONN(宝讯), ManufacturerPart=TYPEC-16P, Operating Temperature=-40℃~+85℃, Voltage Rating=20V, AddInBom=yes, Connect-Disconnect Life=1万次, Connector Type=Type-C, ConvertToPcb=yes, Datasheet=https://item.szlcsc.com/datasheet/TYPEC-16P/56243042.html, FootprintName=USB-C-SMD_TYPEC-16P_C53207138, Gender=母, Length=7.35mm, Mounting Type=卧贴, Number of Contacts=16P, Number of Ports=1, Protocol Standard=-, Supplier=LCSC, Supplier Footprint=SMD, SupplierPart=C53207138, Symbol=TYPEC-16P_C53207138
X1: "晶振类型:贴片晶振;频率:32.768kHz;常温频差:±20ppm;负载电容:12.5pF;", Equivalent Series Resistance(ESR)=70kΩ, JLCPCB Part Class="Basic Part", LCSC Part Name="32.768kHz ±20ppm 12.5pF", Load Capacitance=12.5pF, Manufacturer=EPSON(爱普生), ManufacturerPart=Q13FC13500004, Normal temperature Frequency Tolerance=±20ppm, Operating Temperature=-40℃~+85℃, AddInBom=yes, ConvertToPcb=yes, Datasheet=https://item.szlcsc.com/datasheet/Q13FC13500004/33310.html, FootprintName=FC-135R_L3.2-W1.5, ModelId=751105e878f044059ef0ee72de95f96e, ModelName=FC-135R_L3.2-W1.5, ModelTransform=125.984,59.055,0,0,0,0,0,0,0, Supplier=LCSC, Supplier Footprint=SMD3215-2P, SupplierPart=C32346, Symbol=Q13FC1350000400, Type=贴片晶振

## Via types
v1: diameter 19.68, hole 11.81, Top Layer to Bottom Layer, tented top, 11 vias
v2: diameter 50, hole 28, Top Layer to Bottom Layer, tented top, 5 vias

## Nets (pads, with @x,y where several pads share a name; then routed paths per layer and width w, separated by ;. In a path a pad name is that pad's centre, name@x,y a point inside that pad or via, vN(x,y) a via of type N, cw(c..) or ccw(c..) an arc to the next point about the centre after c; other vN are vias at no path point)
3V3: BUZZER1.1 C1.2 C2.1 C4.2 C5.2 C6.2 C10.2 D2.1 Function_LED.2 JP2.2 JP4.5 JP5.2 U1.1 U1.9 U1.24 U1.48 U2.2 | length 7269.3
  Top Layer w10: C2.1 3416.57,2625 3423.3,2631.73 U1.48 3423.64,2631.73 3411.85,2619.95 3411.85,2616.85 v1(3410,2615) ; C1.2 3466.18,2525 3466.18,2536.2 3460,2542.38 v1(3460,2545) 3462.62,2545 3471.09,2553.47 3506.44,2553.47 3506.73,2553.76 U1.1 ; U1.24 3857.68,2848.27 C6.2 ; U1.24@3784.71,2848.27 3785,2848.56 v2(3785,2910)
  Top Layer w20: U1.9 3664.21,2174.62 C10.2 3708.62,2129.81 U2.2 3717.88,2072.4 3845.28,1945 4080,1945 ; U2.2@3717.88,2073.7 3719.18,2072.4 3799.28,2072.4 3806.88,2080 v2(3815,2080) ; Function_LED.2 4140,2005 4080,1945 ; BUZZER1.1 4538.19,1551.58 D2.1 4529.88,1543.51 4481.49,1543.51 4080,1945
  Bottom Layer w20: JP5.2 2651.5,2313.5 3228.5,2313.5 v1(3460,2545) ; JP4.5 2935,3280 3410,2805 v1(3410,2615) 3460,2565 v1(3460,2545) ; v2(3815,2080) 3815,2505 3751.4,2568.6 ; JP2.2 4720,2910 v2(3785,2910) 3751.4,2876.4 3751.4,2568.6 ; v1(3460,2545) 3460,2547.62 3475.66,2563.28 3475.66,2571.55 3484.11,2580 3740,2580 3751.4,2568.6
B-: C14.2 JP8.2 Q3.1 U5.6 | length 757.8
  Top Layer w30: JP8.2 2934.99,1655 2953.46,1673.46 3060,1780 C14.2 3061.81,1792.6 U5.6 3156.34,1792.6 3213.93,1735 3470.71,1735 3525.12,1789.41 3564.96,1789.41 Q3.1
BAT+: C12.2 JP8.1 R15.1 U3.5 U4.2 | length 1909
  Top Layer w10: v1(3135,2155) 3140,2160 C12.2
  Top Layer w50: R15.1 2985,1784.41 2784.41,1784.41 2760,1760 2760,1600 2782.39,1577.61 2902.39,1577.61 JP8.1 2995,1485 3250,1485 3348.98,1583.98 U4.2
  Bottom Layer w30: JP8.1 2825.2,1654.8 2825.2,1820.2 v1(3135,2130)
BOOT0: R2.1 U1.44 | length 76.7
  Top Layer w10: R2.1 3422.83,2710 3423.3,2710.47 U1.44
GND: C1.1 C2.2 C3.1 C4.1 C5.1 C6.1 C7.1 C8.1 C9.1 C10.1 C11.1 C12.1 C13.1 JP2.3 JP3.2 JP4.1 JP5.1 JP5.28 JP6.2 JP7.2 Q1.2 Q2.2 Q3.3 R2.2 R5.1 R7.1 R8.1 R9.1 R10.1 R14.1 R16.1 SW1.1 SW2.2 U1.8 U1.23 U1.47 U2.1 U3.1 U3.3 U3.9 USB1.12 USB1.13 USB1.14 USB1.15 USB1.A12B1 USB1.B12A1 | length 149.1
  Top Layer w10: v1@2835,2070 2835.28,2069.72 2840.31,2069.72 R8.1 ; v1(2836.65,2067.05) 2836.45,2067.05 C9.1 2834.4,2025 v1(2835,2025) 2836.85,2023.15 2836.85,2018.74 R9.1
  other v1: 3360,1840
MID: Q3.2 Q3.5 | length 106.3
  Top Layer w10: Q3.5 Q3.2
NetBUZZER1_2: BUZZER1.2 D2.2 Q2.3 | length 552.3
  Top Layer w10: D2.2 4532.5,1714.11 4558.39,1740 BUZZER1.2@4791.58,1740 ; Q2.3 4668.43,1880 BUZZER1.2 ; BUZZER1.2@4791.58,1740 BUZZER1.2 ; BUZZER1.2@4791.58,1740 BUZZER1.2
NetC14_1: C14.1 R15.2 U5.5 | length 166.2
  Top Layer w10: R15.2 C14.1 3106.53,1845.59 3122.12,1830 U5.5
NetCharge_LED_1: Charge_LED.1 R11.1 | length 600
  Top Layer w10: R11.1 3015.59,2305.59 3055,2345 3205,2345 3395,2155 Charge_LED.1
NetCharge_LED_3: Charge_LED.3 R12.1 | length 505.5
  Top Layer w10: R12.1 3065.59,2310.59 3080,2325 3190,2325 3210,2305 3210,2114.34 3195,2099.34 Charge_LED.3
NetFunction_LED_1: Function_LED.1 R1.1 | length 214.1
  Top Layer w10: R1.1 4240,2109.41 Function_LED.1
NetFunction_LED_3: Function_LED.3 R3.1 | length 151.6
  Top Layer w10: R3.1 4012.8,2166.02 4012.8,2163.34 4040,2136.14 Function_LED.3
NetQ1_1: Q1.1 R4.2 R5.2 | length 130.3
  Top Layer w10: Q1.1 3801.97,1795 3854.41,1795 R5.2 R4.2
NetQ2_1: Q2.1 R6.1 R7.2 | length 126
  Top Layer w10: R6.1 4405.01,1919.41 4455,1919.41 R7.2 4462.98,1917.4 Q2.1
NetQ3_4: Q3.4 U5.3 | length 231.2
  Top Layer w10: U5.3 3249.45,1871.61 3273.81,1871.61 3287.2,1885 3424.41,1885 3442.01,1867.4 Q3.4
NetQ3_6: Q3.6 U5.1 | length 216.6
  Top Layer w10: U5.1 Q3.6
NetR8_2: R8.2 USB1.A5 | length 58.8
  Top Layer w10: USB1.A5 2813.54,2094.13 R8.2
NetR9_2: R9.2 USB1.B5 | length 64.2
  Top Layer w10: USB1.B5 2800.43,1976.02 R9.2
NetR10_2: R10.2 U3.2 | length 167.2
  Top Layer w10: R10.2 2950.42,1854.41 2992.89,1896.88 2993.19,1896.88 3000,1903.69 U3.2
NetR11_2: R11.2 U3.7 | length 120.4
  Top Layer w10: R11.2 2965,2249.42 2965,2191.01 2992.89,2163.12 2993.19,2163.12 3000,2156.31 U3.7
NetR12_2: R12.2 U3.6 | length 61.4
  Top Layer w10: R12.2 3041.29,2163.12 3043.19,2163.12 3050,2156.31 U3.6
NetR16_2: R16.2 U5.2 | length 84.2
  Top Layer w10: U5.2 R16.2
NRST: C3.2 JP4.3 SW1.2 U1.7 | length 1796.7
  Top Layer w10: C3.2 3516.3,2325 3527.09,2314.21 SW1.2 3583.15,2333.43 3599.14,2333.43 3624.84,2359.12 U1.7 3624.84,2617.54 3620,2622.38 v1(3620,2625)
  Bottom Layer w10: JP4.3 3135,3291.98 3620,2806.98 v1(3620,2625)
PA0: R4.1 U1.10 | length 881.3
  Top Layer w10: U1.10 3683.9,2521.1 3905,2300 v2(3905,2290) ; R4.1 3925.59,1875 3957.38,1875 3972.38,1890 v1(3975,1890)
  Bottom Layer w10: v2(3905,2290) 3985,2210 3985,2056.31 3975,2046.31 v1(3975,1890)
PA1: R3.2 U1.11 | length 444.2
  Top Layer w10: U1.11 3703.7,2572.56 3703.7,2541.3 3975,2270 3975,2255 R3.2
PA2: R1.2 U1.12 | length 531.8
  Top Layer w10: U1.12 3723.27,2548.64 3723.56,2548.35 3728.68,2548.35 3996.44,2280.59 R1.2
PA3: R6.2 U1.13 | length 942.4
  Top Layer w10: U1.13 3806.7,2631.73 4132.85,2305.59 4139.15,2305.59 4145,2299.73 4145,2293.43 4400,2038.43 R6.2@4400,1963.2
PA4: C13.2 R13.1 R14.2 U1.14 | length 1411.9
  Top Layer w10: U1.14@3780.95,2651.42 3858.58,2651.42 v2(3925,2585) ; C13.2 4280,1500 v2(4280,1670)
  Bottom Layer w10: v2(3925,2585) 4281.5,2228.5 4281.5,1847.81 4280,1846.31 v2(4280,1670)
PA5: JP3.1 U1.15 | length 1425.9
  Top Layer w10: U1.15 4153.9,2671.1 4685,2140 4928.46,2140 4935,2133.46 4935,2090 JP3.1
PA6: JP6.1 U1.16 | length 1257.4
  Top Layer w10: U1.16 4334.21,2690.79 4575,2450 JP6.1
PA7: JP7.1 U1.17 | length 1213.4
  Top Layer w10: U1.17 4330.47,2710.47 4455,2835 4930,2835 JP7.1
PA8: JP5.23 U1.29 | length 1362.4
  Top Layer w5: JP5.23 3440,3455 3644.53,3250.47 U1.29
PA9: JP5.22 U1.30 | length 1412.9
  Top Layer w5: JP5.22 2649,3394 3446,3394 3624.84,3215.16 U1.30
PA10: JP5.21 U1.31 | length 1234.4
  Top Layer w5: JP5.21 2720,3345 3430,3345 3605.16,3169.84 U1.31
PA11: JP5.20 U1.32 | length 1273.2
  Top Layer w5: JP5.20 2649,3294 3406,3294 3585.47,3114.53 U1.32
PA12: JP5.19 U1.33 | length 1085.8
  Top Layer w5: JP5.19 3365,3255 3564.71,3055.29 3564.71,2908.4 U1.33
PA15: JP5.13 U1.38 | length 790
  Top Layer w5: JP5.13 3235,2955 3361.42,2828.58 U1.38
PB0: JP2.1 U1.18 | length 1274.8
  Top Layer w10: U1.18 4175.16,2730.16 4470,3025 JP2.1
PB1: SW2.1 U1.19 | length 1006.3
  Top Layer w10: U1.19 3949.84,2749.84 4200,3000 SW2.1
PB2: JP5.14 U1.20 | length 1292.2
  Top Layer w5: JP5.14 2654.85,2955 2693.85,2994 3286,2994 3385,2895 3443.29,2895 3484.71,2853.58 3484.71,2835.29 3550.47,2769.53 U1.20
PB3: JP5.12 U1.39 | length 889.1
  Top Layer w5: JP5.12 2649,2894 3231,2894 3316.1,2808.9 U1.39
PB4: JP5.11 U1.40 | length 764.9
  Top Layer w5: JP5.11 3170,2855 3235.79,2789.21 U1.40
PB5: JP5.10 U1.41 | length 874.3
  Top Layer w5: JP5.10@2615,2750 2675,2810 3135,2810 3175.47,2769.53 U1.41
PB6: JP5.9 U1.42 | length 737.7
  Top Layer w5: JP5.9@2710,2749.84 U1.42
PB7: JP5.8 U1.43 | length 870.8
  Top Layer w5: JP5.8 2666.25,2711.25 3141.25,2711.25 3162.5,2732.5 3389.29,2732.5 3391.63,2730.16 U1.43
PB8: JP5.7 U1.45 | length 752.5
  Top Layer w5: JP5.7 3140,2655 3172.5,2687.5 3389.29,2687.5 3392.58,2690.79 U1.45
PB9: JP5.6 U1.46 | length 885.8
  Top Layer w5: JP5.6 2671,2616 3151,2616 3200,2665 3380.93,2665 3387.03,2671.1 U1.46
PB10: JP5.15 U1.21 | length 1182.4
  Top Layer w5: JP5.15 3300.86,3055 3566.65,2789.21 U1.21
PB11: JP5.16 U1.22 | length 1334.8
  Top Layer w5: JP5.16 2654.85,3055 2693.85,3094 3326,3094 3455,2965 3455,2916.71 3501.42,2870.29 3549.71,2870.29 3611.1,2808.9 U1.22
PB12: JP5.27 U1.25 | length 1647.7
  Top Layer w5: JP5.27 3530,3655 3723.27,3461.73 U1.25
PB13: JP5.26 U1.26 | length 1686.5
  Top Layer w5: JP5.26 2649,3594 3516,3594 3703.58,3406.42 U1.26
PB14: JP5.25 U1.27 | length 1499.2
  Top Layer w5: JP5.25 3475,3555 3683.9,3346.1 U1.27
PB15: JP5.24 U1.28 | length 1538
  Top Layer w5: JP5.24 2649,3494 3461,3494 3664.21,3290.79 U1.28
PC13: JP5.4 U1.2 | length 1042.3
  Top Layer w5: JP5.4 2649,2416 3166,2416 3287.5,2537.5 3424.07,2537.5 3496.28,2609.71 3513.61,2609.71 3526.42,2596.89 U1.2
PC14: C7.2 U1.3 X1.1 | length 305.9
  Top Layer w10: X1.1 3339.21,2455 C7.2 3459.41,2490 3515,2490 3546.1,2521.1 U1.3
PC15: C8.2 U1.4 X1.2 | length 378.1
  Top Layer w10: X1.2 3336.75,2382.54 3411.95,2382.54 3449.41,2420 3504.69,2420 3565.67,2480.99 3565.67,2572.56 U1.4
PF0: JP5.3 U1.5 | length 977.4
  Top Layer w5: JP5.3 3140,2455 3232.5,2547.5 3419.93,2547.5 3492.14,2619.71 3562.66,2619.71 3585.47,2596.89 U1.5
PF1: JP5.5 U1.6 | length 963.9
  Top Layer w5: JP5.5 2725.69,2555 2740.69,2570 3428.29,2570 3487.99,2629.71 3572.34,2629.71 3605.16,2596.89 U1.6
PF6: JP5.18 U1.35 | length 1116.5
  Top Layer w5: JP5.18 2649,3194 3351,3194 3526.42,3018.58 U1.35
PF7: JP5.17 U1.36 | length 935
  Top Layer w5: JP5.17 3320,3155 3506.73,2968.27 U1.36
PUMP-: D1.2 JP1.2 Q1.3 | length 480.7
  Top Layer w10: Q1.3 3720.63,1682.47 3726.49,1676.61 3770,1676.61 D1.2 3814.37,1672.24 4017.76,1672.24 JP1.2
SWCLK: JP4.4 U1.37 | length 1100.8
  Top Layer w5: v1(3400,2850) 3400.86,2849.14 3446.82,2849.14 U1.37
  Bottom Layer w10: JP4.4@3035,3751.26 3035,3280 3400,2915 v1(3400,2850)
SWDIO: JP4.2 U1.34 | length 971.5
  Top Layer w10: v1(3545,2955) 3545.98,2954.02 3545.98,2907.44 U1.34
  Bottom Layer w10: JP4.2 3235,3310 3545,3000 v1(3545,2955)
SYS_BAT+: C11.2 D1.1 JP1.1 R13.2 U2.3 U4.3 | length 1298.3
  Top Layer w20: U4.3@3537.95,1601.02 3539.5,1599.47 3539.5,1575.85 3606.33,1509.02 3775.63,1509.02 D1.1 ; U4.3 3537.95,1628.62 3620,1710.67 3620,1921.85 3620,1931.85 3620,2028.19 3613.19,2035 U2.3 ; 3620,1932.74 3667.15,1932.74 C11.2 ; D1.1@3795,1518.39 3841.61,1565 JP1.1 4174.41,1565 R13.2
USB_5V: C9.2 Charge_LED.2 U3.4 U3.8 USB1.A9B4 USB1.B9A4 | length 1058.2
  Top Layer w10: 2824.41,2138.82 2825,2139.41
  Top Layer w20: USB1.A9B4 2905,1950.43 ; USB1.B9A4 2824.41,2139.41 2825,2139.41 2905,2139.41 ; C9.2 2905,2005.58 2905,1950.43 ; 2883.38,2039.99 2883.38,2052.79 2905,2074.41 2905,2139.41 ; U3.8 2950,2141.22 2948.19,2139.41 2905,2139.41 ; Charge_LED.2 3130.1,1920.1 3101.81,1920.1 3100,1918.28 U3.4 3098.19,1917.31 3098.19,1929.12 3067.31,1960 2937.85,1960 2928.29,1950.43 2905,1950.43
pads on no net: U4.1 U5.4 USB1.A6 USB1.A7 USB1.A8 USB1.B6 USB1.B7 USB1.B8

## Keep-outs
Keep-Out Layer:
  the board outline again, w10

## Other copper
Top Layer:
  rectangle net BAT+: 3090,2120 3155,2170
  text "Designed by GentleUlrica" at 3510,3759.99 h60

## Text inside footprints (layer, text, board x,y; h text height)
JP5: Top Overlay "2" at 2630,2255 h40 r90; Top Overlay "1" at 2730,2265 h40 r90; Top Overlay "27" at 2730,3715 h40 r90; Top Overlay "28" at 2630,3715 h40 r90